# Altium PCB cc_laser_supply_rev-B(1).PcbDoc
Units mm, origin at the board's own origin, x right, y up, seen from the top; angles counter-clockwise.
Board outline 152.4 x 76.2 mm, 4 copper layers (F.Cu, In1.Cu, In2.Cu, B.Cu); 127 components, 120 nets, 405 pads, 0 vias.
Unrouted connection lines stored in the file: 242.
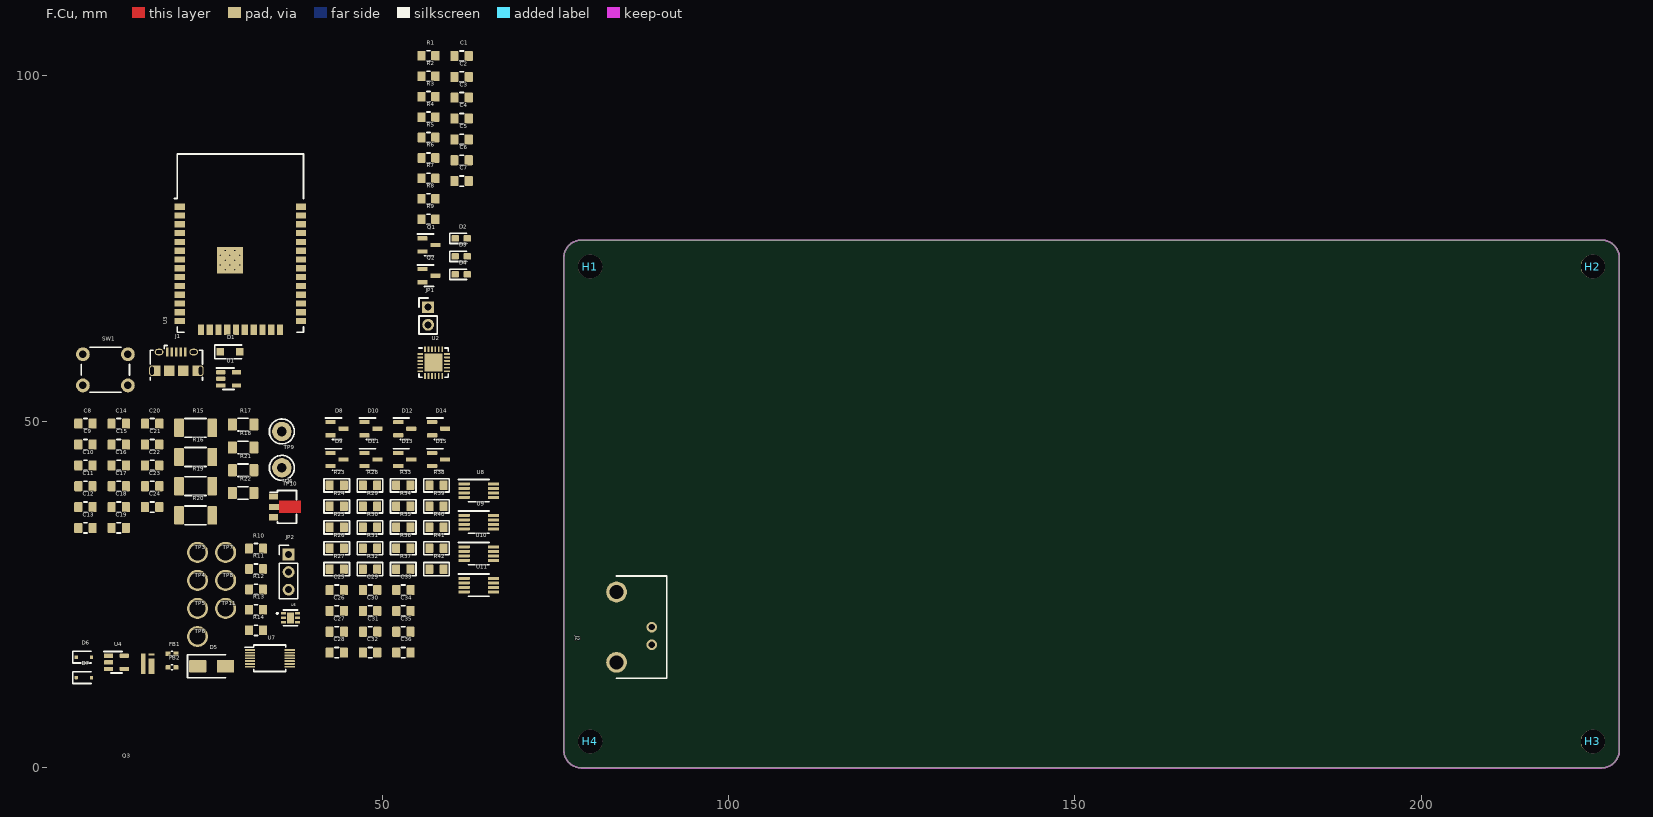
[diagram p0: F.Cu view]
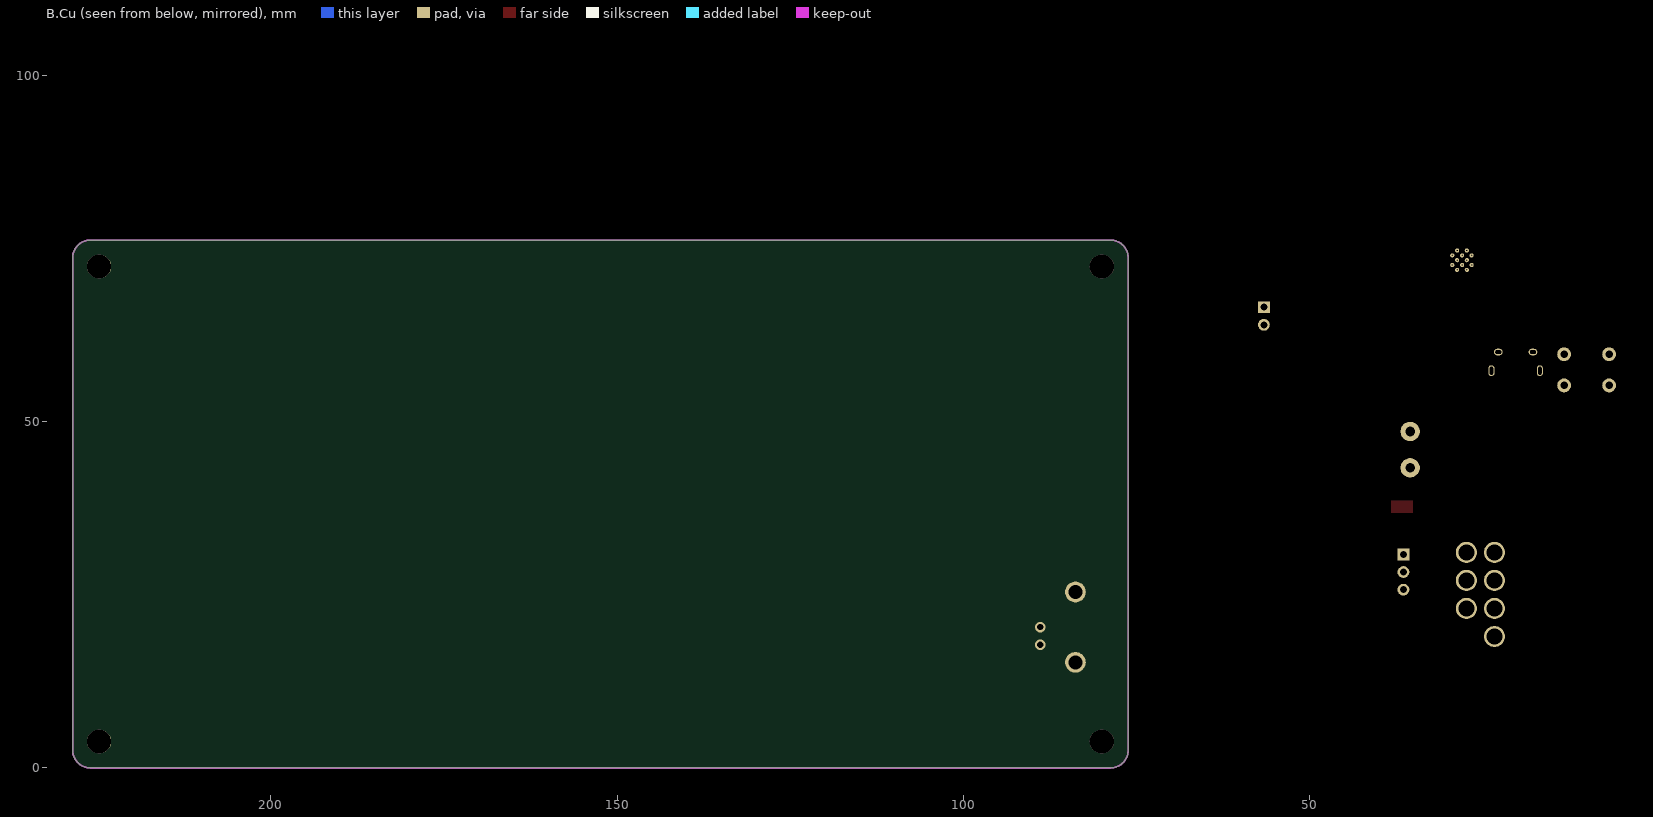
[diagram p1: B.Cu view, seen from below]

## Layer stack, top to bottom
F.Mask: solder mask 0.0102, Solder Resist, Dk 3.5
F.Cu: signal copper 0.0356
Dielectric 1: dielectric 0.32, FR-4, Dk 4.8
In1.Cu: signal copper 0.0356
Dielectric2: dielectric 0.32, FR-4, Dk 4.8
In2.Cu: signal copper 0.0356
Dielectric3: dielectric 0.32, FR-4, Dk 4.8
B.Cu: signal copper 0.0356
B.Mask: solder mask 0.0102, Solder Resist, Dk 3.5

## Board outline
226.06,0 78.74,0 cw(c78.74,2.54) 76.2,2.54 76.2,73.66 cw(c78.74,73.66) 78.74,76.2 226.06,76.2 cw(c226.06,73.66) 228.6,73.66 228.6,2.54 cw(c226.06,2.54) 226.06,0

## Design rules (kind name [scope] priority, off if disabled: settings)
Clearance "Clearence 0.05_PadClass" [InPadClass('Pad Class Clearance 0.05')] p1: gap=0.05 ignorepadtopadclearanceinfootprint=FALSE
MinimumSolderMaskSliver [All] p1: minsoldermaskwidth=0
PolygonConnect [All] p1: connectstyle=Direct reliefconductorwidth=0.254 reliefentries=4 polygonreliefangle="90 Angle" airgapwidth=0.254
RoutingVias [All] p1: holewidth=0.711 width=1.27 viastyle="Through Hole" minholewidth=0.711 minwidth=1.27 maxholewidth=0.711 maxwidth=1.27
SilkToSilkClearance [All] p1: silktosilkclearance=0
SilkToSolderMaskClearance [IsPad] p1: minsilkscreentomaskgap=0 clearancetoexposedcopper=TRUE
SolderMaskExpansion [All] p1: expansion=0.102 istentingtop=FALSE
Width [All] p1: maxlimit=0.254 minlimit=0.254 preferedwidth=0.254
27 further rules are at their usual default settings.

## Classes and differential pairs
pad class "Pad Class Clearance 0.05": Q3-1 Q3-2 Q3-3

## Components (designator, comment, footprint, x,y, rotation, side; value= is the part's Value field where it differs from the comment)
C1 "Comment" C_0805_2012Metric_Pad1.18x1.45mm_HandSolder 61.437,102.785 r0 top
C2 "Comment" C_0805_2012Metric_Pad1.18x1.45mm_HandSolder 61.437,99.775 r0 top
C3 "Comment" C_0805_2012Metric_Pad1.18x1.45mm_HandSolder 61.437,96.765 r0 top
C4 "Comment" C_0805_2012Metric_Pad1.18x1.45mm_HandSolder 61.437,93.755 r0 top
C5 "Comment" C_0805_2012Metric_Pad1.18x1.45mm_HandSolder 61.437,90.745 r0 top
C6 "Comment" C_0805_2012Metric_Pad1.18x1.45mm_HandSolder 61.437,87.735 r0 top
C7 "Comment" C_0805_2012Metric_Pad1.18x1.45mm_HandSolder 61.437,84.725 r0 top
C8 "Comment" C_0805_2012Metric_Pad1.18x1.45mm_HandSolder 7.137,49.695 r0 top
C9 "Comment" C_0805_2012Metric_Pad1.18x1.45mm_HandSolder 7.137,46.685 r0 top
C10 "Comment" C_0805_2012Metric_Pad1.18x1.45mm_HandSolder 7.137,43.675 r0 top
C11 "Comment" C_0805_2012Metric_Pad1.18x1.45mm_HandSolder 7.137,40.665 r0 top
C12 "Comment" C_0805_2012Metric_Pad1.18x1.45mm_HandSolder 7.137,37.655 r0 top
C13 "Comment" C_0805_2012Metric_Pad1.18x1.45mm_HandSolder 7.137,34.645 r0 top
C14 "Comment" C_0805_2012Metric_Pad1.18x1.45mm_HandSolder 11.947,49.695 r0 top
C15 "Comment" C_0805_2012Metric_Pad1.18x1.45mm_HandSolder 11.947,46.685 r0 top
C16 "Comment" C_0805_2012Metric_Pad1.18x1.45mm_HandSolder 11.947,43.675 r0 top
C17 "Comment" C_0805_2012Metric_Pad1.18x1.45mm_HandSolder 11.947,40.665 r0 top
C18 "Comment" C_0805_2012Metric_Pad1.18x1.45mm_HandSolder 11.947,37.655 r0 top
C19 "Comment" C_0805_2012Metric_Pad1.18x1.45mm_HandSolder 11.947,34.645 r0 top
C20 "Comment" C_0805_2012Metric_Pad1.18x1.45mm_HandSolder 16.758,49.695 r0 top
C21 "Comment" C_0805_2012Metric_Pad1.18x1.45mm_HandSolder 16.758,46.685 r0 top
C22 "Comment" C_0805_2012Metric_Pad1.18x1.45mm_HandSolder 16.758,43.675 r0 top
C23 "Comment" C_0805_2012Metric_Pad1.18x1.45mm_HandSolder 16.758,40.665 r0 top
C24 "Comment" C_0805_2012Metric_Pad1.18x1.45mm_HandSolder 16.758,37.655 r0 top
C25 "Comment" C_0805_2012Metric_Pad1.18x1.45mm_HandSolder 43.418,25.675 r0 top
C26 "Comment" C_0805_2012Metric_Pad1.18x1.45mm_HandSolder 43.418,22.665 r0 top
C27 "Comment" C_0805_2012Metric_Pad1.18x1.45mm_HandSolder 43.418,19.655 r0 top
C28 "Comment" C_0805_2012Metric_Pad1.18x1.45mm_HandSolder 43.418,16.645 r0 top
C29 "Comment" C_0805_2012Metric_Pad1.18x1.45mm_HandSolder 48.228,25.675 r0 top
C30 "Comment" C_0805_2012Metric_Pad1.18x1.45mm_HandSolder 48.228,22.665 r0 top
C31 "Comment" C_0805_2012Metric_Pad1.18x1.45mm_HandSolder 48.228,19.655 r0 top
C32 "Comment" C_0805_2012Metric_Pad1.18x1.45mm_HandSolder 48.228,16.645 r0 top
C33 "Comment" C_0805_2012Metric_Pad1.18x1.45mm_HandSolder 53.038,25.675 r0 top
C34 "Comment" C_0805_2012Metric_Pad1.18x1.45mm_HandSolder 53.038,22.665 r0 top
C35 "Comment" C_0805_2012Metric_Pad1.18x1.45mm_HandSolder 53.038,19.655 r0 top
C36 "Comment" C_0805_2012Metric_Pad1.18x1.45mm_HandSolder 53.038,16.645 r0 top
D1 "Comment" D_SOD-123F 28.002,60.075 r0 top
D2 "Comment" LED_0603_1608Metric_Pad1.05x0.95mm_HandSolder 61.393,76.445 r0 top
D3 "Comment" LED_0603_1608Metric_Pad1.05x0.95mm_HandSolder 61.393,73.855 r0 top
D4 "Comment" LED_0603_1608Metric_Pad1.05x0.95mm_HandSolder 61.393,71.265 r0 top
D5 "Comment" D_SMA 25.362,14.675 r0 top
D6 "Comment" D_SOD-323F 6.903,15.995 r0 top
D7 "Comment" D_SOD-323F 6.903,13.045 r0 top
D8 "Comment" SOT-23 43.458,48.975 r0 top
D9 "Comment" SOT-23 43.458,44.525 r0 top
D10 "Comment" SOT-23 48.348,48.975 r0 top
D11 "Comment" SOT-23 48.348,44.525 r0 top
D12 "Comment" SOT-23 53.238,48.975 r0 top
D13 "Comment" SOT-23 53.238,44.525 r0 top
D14 "Comment" SOT-23 58.128,48.975 r0 top
D15 "Comment" SOT-23 58.128,44.525 r0 top
FB1 "Comment" C_0402_1005Metric_Pad0.74x0.62mm_HandSolder 19.627,16.485 r0 top
FB2 "Comment" C_0402_1005Metric_Pad0.74x0.62mm_HandSolder 19.627,14.515 r0 top
H1 "Comment" MountingHole_3.5mm 80.01,72.39 r0 top
H2 "Comment" MountingHole_3.5mm 224.79,72.39 r0 top
H3 "Comment" MountingHole_3.5mm 224.79,3.81 r0 top
H4 "Comment" MountingHole_3.5mm 80.01,3.81 r0 top
J1 "Comment" USB_Micro-B_Amphenol_10118194_Horizontal 20.258,58.645 r0 top
J2 "Comment" BNC_Molex_0731375003 83.82,20.32 r270 top
JP1 "Comment" PinHeader_1x02_P2.54mm_Vertical 56.607,66.515 r0 top
JP2 "Comment" PinHeader_1x03_P2.54mm_Vertical 36.457,30.815 r0 top
Q1 "Comment" SOT-23 56.727,75.515 r0 top
Q2 "Comment" SOT-23 56.727,71.065 r0 top
Q3 "Comment" 3-FCLGA_3.2x2.2mm 16.097,15.045 r0 top
R1 "Comment" R_0805_2012Metric_Pad1.20x1.40mm_HandSolder 56.657,102.815 r0 top
R2 "Comment" R_0805_2012Metric_Pad1.20x1.40mm_HandSolder 56.657,99.865 r0 top
R3 "Comment" R_0805_2012Metric_Pad1.20x1.40mm_HandSolder 56.657,96.915 r0 top
R4 "Comment" R_0805_2012Metric_Pad1.20x1.40mm_HandSolder 56.657,93.965 r0 top
R5 "Comment" R_0805_2012Metric_Pad1.20x1.40mm_HandSolder 56.657,91.015 r0 top
R6 "Comment" R_0805_2012Metric_Pad1.20x1.40mm_HandSolder 56.657,88.065 r0 top
R7 "Comment" R_0805_2012Metric_Pad1.20x1.40mm_HandSolder 56.657,85.115 r0 top
R8 "Comment" R_0805_2012Metric_Pad1.20x1.40mm_HandSolder 56.657,82.165 r0 top
R9 "Comment" R_0805_2012Metric_Pad1.20x1.40mm_HandSolder 56.657,79.215 r0 top
R10 "Comment" R_0805_2012Metric_Pad1.20x1.40mm_HandSolder 31.758,31.665 r0 top
R11 "Comment" R_0805_2012Metric_Pad1.20x1.40mm_HandSolder 31.758,28.715 r0 top
R12 "Comment" R_0805_2012Metric_Pad1.20x1.40mm_HandSolder 31.758,25.765 r0 top
R13 "Comment" R_0805_2012Metric_Pad1.20x1.40mm_HandSolder 31.758,22.815 r0 top
R14 "Comment" R_0805_2012Metric_Pad1.20x1.40mm_HandSolder 31.758,19.865 r0 top
R15 "Comment" R_2010_5025Metric_Pad1.40x2.65mm_HandSolder 23.038,49.095 r0 top
R16 "Comment" R_2010_5025Metric_Pad1.40x2.65mm_HandSolder 23.038,44.885 r0 top
R17 "Comment" R_1206_3216Metric_Pad1.30x1.75mm_HandSolder 29.887,49.555 r0 top
R18 "Comment" R_1206_3216Metric_Pad1.30x1.75mm_HandSolder 29.887,46.265 r0 top
R19 "Comment" R_2010_5025Metric_Pad1.40x2.65mm_HandSolder 23.038,40.675 r0 top
R20 "Comment" R_2010_5025Metric_Pad1.40x2.65mm_HandSolder 23.038,36.465 r0 top
R21 "Comment" R_1206_3216Metric_Pad1.30x1.75mm_HandSolder 29.887,42.975 r0 top
R22 "Comment" R_1206_3216Metric_Pad1.30x1.75mm_HandSolder 29.887,39.685 r0 top
R23 "Comment" R_0805_2012Metric_Pad1.15x1.40mm_HandSolder 43.414,40.788 r0 top
R24 "Comment" R_0805_2012Metric_Pad1.15x1.40mm_HandSolder 43.414,37.763 r0 top
R25 "Comment" R_0805_2012Metric_Pad1.15x1.40mm_HandSolder 43.414,34.737 r0 top
R26 "Comment" R_0805_2012Metric_Pad1.15x1.40mm_HandSolder 43.414,31.712 r0 top
R27 "Comment" R_0805_2012Metric_Pad1.15x1.40mm_HandSolder 43.414,28.687 r0 top
R28 "Comment" R_0805_2012Metric_Pad1.15x1.40mm_HandSolder 48.217,40.788 r0 top
R29 "Comment" R_0805_2012Metric_Pad1.15x1.40mm_HandSolder 48.217,37.763 r0 top
R30 "Comment" R_0805_2012Metric_Pad1.15x1.40mm_HandSolder 48.217,34.737 r0 top
R31 "Comment" R_0805_2012Metric_Pad1.15x1.40mm_HandSolder 48.217,31.712 r0 top
R32 "Comment" R_0805_2012Metric_Pad1.15x1.40mm_HandSolder 48.217,28.687 r0 top
R33 "Comment" R_0805_2012Metric_Pad1.15x1.40mm_HandSolder 53.02,40.788 r0 top
R34 "Comment" R_0805_2012Metric_Pad1.15x1.40mm_HandSolder 53.02,37.763 r0 top
R35 "Comment" R_0805_2012Metric_Pad1.15x1.40mm_HandSolder 53.02,34.737 r0 top
R36 "Comment" R_0805_2012Metric_Pad1.15x1.40mm_HandSolder 53.02,31.712 r0 top
R37 "Comment" R_0805_2012Metric_Pad1.15x1.40mm_HandSolder 53.02,28.687 r0 top
R38 "Comment" R_0805_2012Metric_Pad1.15x1.40mm_HandSolder 57.823,40.788 r0 top
R39 "Comment" R_0805_2012Metric_Pad1.15x1.40mm_HandSolder 57.823,37.763 r0 top
R40 "Comment" R_0805_2012Metric_Pad1.15x1.40mm_HandSolder 57.823,34.737 r0 top
R41 "Comment" R_0805_2012Metric_Pad1.15x1.40mm_HandSolder 57.823,31.712 r0 top
R42 "Comment" R_0805_2012Metric_Pad1.15x1.40mm_HandSolder 57.823,28.687 r0 top
SW1 "Comment" SW_PUSH_6mm 6.757,59.725 r0 top
TP3 "Comment" Keystone-1502-2 23.316,31.116 r0 top
TP4 "Comment" Keystone-1502-2 23.316,27.068 r0 top
TP5 "Comment" Keystone-1502-2 23.316,23.02 r0 top
TP6 "Comment" Keystone-1502-2 23.316,18.972 r0 top
TP7 "Comment" Keystone-1502-2 27.364,31.116 r0 top
TP8 "Comment" Keystone-1502-2 27.364,27.068 r0 top
TP9 "Comment" TestPoint_Loop_D3.50mm_Drill1.4mm_Beaded 35.488,48.575 r0 top
TP10 "Comment" TestPoint_Loop_D3.50mm_Drill1.4mm_Beaded 35.488,43.325 r0 top
TP11 "Comment" Keystone-1502-2 27.364,23.02 r0 top
U1 "Comment" SOT-23-5 27.808,56.175 r0 top
U2 "Comment" QFN-24-1EP_4x4mm_P0.5mm_EP2.6x2.6mm 57.408,58.515 r0 top
U3 "Comment" ESP32-WROOM-32D 29.508,72.775 r0 top
U4 "Comment" SOT-23-5 11.598,15.245 r0 top
U5 "Comment" UCC27611DRVT 36.742,21.665 r0 top
U6 "Comment" SOT-89-3 36.237,37.675 r0 top
U7 "Comment" TSSOP-14_4.4x3.6mm_P0.4mm 33.757,15.815 r0 top
U8 "Comment" MSOP-8_3x3mm_P0.65mm 63.927,40.025 r0 top
U9 "Comment" MSOP-8_3x3mm_P0.65mm 63.927,35.475 r0 top
U10 "Comment" MSOP-8_3x3mm_P0.65mm 63.927,30.925 r0 top
U11 "Comment" MSOP-8_3x3mm_P0.65mm 63.927,26.375 r0 top

## Footprints (in the part's own frame and the unit in brackets; to place one, negate y for a bottom-side part, rotate by r counter-clockwise, add the part's x,y. Pads: shape width x height; smd on the part's side, far side on the other; paste and mask are expansions set on the pad)
3-FCLGA_3.2x2.2mm [mm]
  rect 0.85x0.31 smd mask+0.102: 1(0.545,1.32)
  rect 0.654x2.95 smd mask+0.102: 2(-0.65,0)
  rect 0.85x2.2 smd mask+0.102: 3(0.545,-0.375)
BNC_Molex_0731375003 [mm]
  round 1.524 hole 0.89 paste-2539.97 mask+0.102: 1(0,5.08) 2(2.54,5.08)
  round 3 hole 2.01 paste-2539.97 mask+0.102: Un1(-5.08,0) Un2(5.08,0)
  silkscreen extent -7.38,0 7.38,7.25
C_0402_1005Metric_Pad0.74x0.62mm_HandSolder [mm]
  rrect25% 0.735x0.62 smd mask+0.102: 1(-0.567,0) 2(0.567,0)
  silkscreen extent -0.12,-0.36 0.12,0.36
C_0805_2012Metric_Pad1.18x1.45mm_HandSolder [mm]
  rrect21% 1.175x1.45 smd mask+0.102: 1(-1.038,0) 2(1.038,0)
  silkscreen extent -0.26,-0.73 0.26,0.73
D_SMA [mm]
  rrect14% 2.5x1.8 smd mask+0.102: 1(-2,0) 2(2,0)
  silkscreen extent -3.51,-1.65 2,1.65
D_SOD-123F [mm]
  rrect23% 1.1x1.1 smd mask+0.102: 1(-1.4,0) 2(1.4,0)
  silkscreen extent -2.21,-1 1.65,1
D_SOD-323F [mm]
  rrect25% 0.5x0.5 smd mask+0.102: 1(-1.1,0) 2(1.1,0)
  silkscreen extent -1.61,-0.85 1.05,0.85
ESP32-WROOM-32D [mm]
  rect 1.5x0.9 smd mask+0.102: 1(-8.75,8.25) 2(-8.75,6.98) 3(-8.75,5.71) 4(-8.75,4.44) 5(-8.75,3.17) 6(-8.75,1.9) 7(-8.75,0.63) 8(-8.75,-0.64) 9(-8.75,-1.91) 10(-8.75,-3.18) 11(-8.75,-4.45) 12(-8.75,-5.72) 13(-8.75,-6.99) 14(-8.75,-8.26) 25(8.75,-8.26) 26(8.75,-6.99) 27(8.75,-5.72) 28(8.75,-4.45) 29(8.75,-3.18) 30(8.75,-1.91) 31(8.75,-0.64) 32(8.75,0.63) 33(8.75,1.9) 34(8.75,3.17) 35(8.75,4.44) 36(8.75,5.71) 37(8.75,6.98) 38(8.75,8.25)
  rect 0.9x1.5 smd mask+0.102: 15(-5.71,-9.51) 16(-4.44,-9.51) 17(-3.17,-9.51) 18(-1.9,-9.51) 19(-0.63,-9.51) 20(0.64,-9.51) 21(1.91,-9.51) 22(3.18,-9.51) 23(4.45,-9.51) 24(5.72,-9.51)
  rect 0.9x0.9 smd mask-0.9: 39(-2.9,-0.87) 39(-2.9,0.53) 39(-2.9,1.93) 39(-1.5,-0.87) 39(-1.5,0.53) 39(-1.5,1.93) 39(-0.1,-0.87) 39(-0.1,0.53) 39(-0.1,1.93)
  round 0.6 hole 0.2 paste-2539.97 mask+0.102: 39(-2.9,-0.17) 39(-2.9,1.23) 39(-2.2,-0.87) 39(-2.2,0.53) 39(-2.2,1.93) 39(-1.525,-0.17) 39(-1.525,1.23) 39(-0.8,-0.87) 39(-0.8,0.53) 39(-0.8,1.93) 39(-0.1,-0.17) 39(-0.1,1.23)
  rect 3.8x3.8 smd paste-3.8 mask+0.102: 39(-1.5,0.53)
  silkscreen extent -9.5,-9.88 9.12,15.86
Keystone-1502-2 [mil]
  round 120 hole 90 paste-99999 mask+4: 1(0,0)
LED_0603_1608Metric_Pad1.05x0.95mm_HandSolder [mm]
  rrect25% 1.05x0.95 smd mask+0.102: 1(-0.875,0) 2(0.875,0)
  silkscreen extent -1.66,-0.73 0.8,0.73
MountingHole_3.5mm [mm]
  round 3.5 hole 3.5 paste-2539.97 mask+0.102: Un1(0,0)
MSOP-8_3x3mm_P0.65mm [mm]
  rrect25% 1.625x0.4 smd mask+0.102: 1(-2.113,0.975) 2(-2.113,0.325) 3(-2.113,-0.325) 4(-2.113,-0.975) 5(2.113,-0.975) 6(2.113,-0.325) 7(2.113,0.325) 8(2.113,0.975)
  silkscreen extent -2.93,-1.61 1.5,1.61
PinHeader_1x02_P2.54mm_Vertical [mm]
  rect 1.7x1.7 hole 1 paste-2539.97 mask+0.102: 1(0,0)
  rrect100% 1.7x1.7 hole 1 paste-2539.97 mask+0.102: 2(0,-2.54)
  silkscreen extent -1.33,-3.87 1.33,1.33
PinHeader_1x03_P2.54mm_Vertical [mm]
  rect 1.7x1.7 hole 1 paste-2539.97 mask+0.102: 1(0,0)
  rrect100% 1.7x1.7 hole 1 paste-2539.97 mask+0.102: 2(0,-2.54) 3(0,-5.08)
  silkscreen extent -1.33,-6.41 1.33,1.33
QFN-24-1EP_4x4mm_P0.5mm_EP2.6x2.6mm [mm]
  rrect25% 0.825x0.25 smd mask+0.102: 1(-1.937,1.25) 2(-1.937,0.75) 3(-1.937,0.25) 4(-1.937,-0.25) 5(-1.937,-0.75) 6(-1.937,-1.25) 13(1.937,-1.25) 14(1.937,-0.75) 15(1.937,-0.25) 16(1.937,0.25) 17(1.937,0.75) 18(1.937,1.25)
  rrect25% 0.25x0.825 smd mask+0.102: 7(-1.25,-1.937) 8(-0.75,-1.937) 9(-0.25,-1.937) 10(0.25,-1.937) 11(0.75,-1.937) 12(1.25,-1.937) 19(1.25,1.937) 20(0.75,1.937) 21(0.25,1.937) 22(-0.25,1.937) 23(-0.75,1.937) 24(-1.25,1.937)
  rect 2.6x2.6 smd paste-2.6 mask+0.102: 25(0,0)
  rrect24% 1.05x1.05 on Top Paste mask-1.05: Un1(-0.65,0.65) Un2(-0.65,-0.65) Un3(0.65,0.65) Un4(0.65,-0.65)
  silkscreen extent -2.11,-2.11 2.11,2.11
R_0805_2012Metric_Pad1.15x1.40mm_HandSolder [mm]
  rrect22% 1.15x1.4 smd mask+0.102: 1(-1.025,0) 2(1.025,0)
  silkscreen extent -1.84,-0.95 1.84,0.95
R_0805_2012Metric_Pad1.20x1.40mm_HandSolder [mm]
  rrect21% 1.2x1.4 smd mask+0.102: 1(-1,0) 2(1,0)
  silkscreen extent -0.23,-0.73 0.23,0.73
R_1206_3216Metric_Pad1.30x1.75mm_HandSolder [mm]
  rrect19% 1.3x1.75 smd mask+0.102: 1(-1.55,0) 2(1.55,0)
  silkscreen extent -0.73,-0.91 0.73,0.91
R_2010_5025Metric_Pad1.40x2.65mm_HandSolder [mm]
  rrect18% 1.4x2.65 smd mask+0.102: 1(-2.4,0) 2(2.4,0)
  silkscreen extent -1.53,-1.36 1.53,1.36
SOT-23 [mm]
  rrect25% 1.475x0.6 smd mask+0.102: 1(-0.937,0.95) 2(-0.937,-0.95) 3(0.937,0)
  silkscreen extent -1.68,-1.56 0.65,1.56
SOT-23-5 [mm]
  rrect25% 1.325x0.6 smd mask+0.102: 1(-1.138,0.95) 2(-1.138,0) 3(-1.138,-0.95) 4(1.138,-0.95) 5(1.138,0.95)
  silkscreen extent -1.8,-1.56 0.8,1.56
SOT-89-3 [mm]
  rect 1.3x0.9 smd mask+0.102: 1(-1.95,1.5) 3(-1.95,-1.5)
  rect 1.475x0.9 smd mask+0.102: 2(-1.863,0)
  F.Cu region: 2,-0.867 -1.125,-0.867 -1.125,0.867 2,0.867
  silkscreen extent -2.5,-2.36 1.36,2.36
SW_PUSH_6mm [mm]
  round 2 hole 1.1 paste-2539.97 mask+0.102: 1(0,0) 1(6.5,0) 2(0,-4.5) 2(6.5,-4.5)
  silkscreen extent -0.25,-5.5 6.75,1
TestPoint_Loop_D3.50mm_Drill1.4mm_Beaded [mm]
  round 2.8 hole 1.4 paste-2539.97 mask+0.102: 1(0,0)
  silkscreen extent -1.8,-1.8 1.8,1.8
TSSOP-14_4.4x3.6mm_P0.4mm [mm]
  rrect25% 1.475x0.25 smd mask+0.102: 1(-2.863,1.2) 2(-2.863,0.8) 3(-2.863,0.4) 4(-2.863,0) 5(-2.863,-0.4) 6(-2.863,-0.8) 7(-2.863,-1.2) 8(2.863,-1.2) 9(2.863,-0.8) 10(2.863,-0.4) 11(2.863,0) 12(2.863,0.4) 13(2.863,0.8) 14(2.863,1.2)
  silkscreen extent -3.6,-1.91 2.31,1.91
UCC27611DRVT [mm]
  rect 0.69x0.32 smd mask+0.102: 1(-1.02,0.65) 2(-1.02,0) 3(-1.02,-0.65) 4(1.02,-0.65) 5(1.02,0) 6(1.02,0.65)
  rect 1x1.6 smd paste-1.6 mask+0.102: 7(0,0)
  silkscreen extent -2.01,-1.13 1,1.13
USB_Micro-B_Amphenol_10118194_Horizontal [mm]
  rect 0.4x1.35 smd mask+0.102: 1(-1.3,1.4) 2(-0.65,1.4) 3(0,1.4) 4(0.65,1.4) 5(1.3,1.4)
  rrect100% 0.89x1.55 hole 1.15 slot 0.5 at 0 deg paste-2539.97 mask+0.102: 6(-3.5,-1.3) 6(3.5,-1.3)
  rect 1.2x1.55 smd mask+0.102: 6(-2.9,-1.3) 6(2.9,-1.3)
  rrect100% 1.25x0.95 hole 0.55 slot 0.85 at 0 deg paste-2539.97 mask+0.102: 6(-2.5,1.4) 6(2.5,1.4)
  rect 1.5x1.55 smd mask+0.102: 6(-1,-1.3) 6(1,-1.3)
  rrect100% 0.89x1.55 on Top Paste mask-1.55: Un1(-3.5,-1.3) Un4(3.5,-1.3)
  rrect100% 1.25x0.95 on Top Paste mask-1.25: Un2(-2.5,1.4) Un3(2.5,1.4)
  silkscreen extent -3.76,-2.69 3.76,2.34

## Part data
C1 C2 C3 C4 C5 C6 C7 C8 C9 C10 C11 C12 C13 C14 C15 C16 C17 C18 C19 C20 C21 C22 C23 C24 C25 C26 C27 C28 C29 C30 C31 C32 C33 C34 C35 C36: library part C_0805_2012Metric_Pad1.18x1.45mm_HandSolder, "Capacitor SMD 0805 (2012 Metric), square (rectangular) end terminal, IPC_7351 nominal with elongated pad for handsoldering. (Body size source: IPC-SM-782 page 76, https://www.pcb-3d.com/wordpress/wp-content/uploads/ipc-sm-782a_amendment_1_and_2.pdf, https://docs.google.com/spreadsheets/d/1BsfQQcO9C6DZCsRaXUlFlo91Tg2WpOkGARC1WS5S8t0/edit?usp=sharing), generated with kicad-footprint-generator", ki_description="Unpolarized capacitor, small symbol", ki_keywords="capacitor cap"
  C1 C2 C3 C4 C5 C6 C7: Sheetfile=esp32.kicad_sch, Sheetname=ESP32
  C8 C9 C10 C11 C12 C13 C14 C15 C16 C17 C18 C19 C20 C21 C22 C23 C24: Sheetfile=fet_and_driver.kicad_sch, Sheetname="GaN FET and Current Sensing"
  C25 C26 C27 C28 C29 C30 C31 C32 C33 C34 C35 C36: Sheetfile=peak_detect.kicad_sch, Sheetname="Peak Detection and ADC Filtering"
D1: library part D_SOD-123F, "D_SOD-123F", Sheetfile=esp32.kicad_sch, Sheetname=ESP32, ki_description="Schottky diode", ki_keywords="diode Schottky"
D2 D3 D4: library part LED_0603_1608Metric_Pad1.05x0.95mm_HandSolder, "LED SMD 0603 (1608 Metric), square (rectangular) end terminal, IPC_7351 nominal, (Body size source: http://www.tortai-tech.com/upload/download/2011102023233369053.pdf), generated with kicad-footprint-generator", Sheetfile=esp32.kicad_sch, Sheetname=ESP32
  D2: ki_description="Light emitting diode", ki_keywords="LED diode"
  D3 D4: ki_description="Light emitting diode, small symbol", ki_keywords="LED diode light-emitting-diode"
D5: library part D_SMA, "Diode SMA (DO-214AC)", Sheetfile=fet_and_driver.kicad_sch, Sheetname="GaN FET and Current Sensing", ki_description="Zener diode", ki_keywords=diode
D6 D7: library part D_SOD-323F, "SOD-323F http://www.nxp.com/documents/outline_drawing/SOD323F.pdf", Sheetfile=fet_and_driver.kicad_sch, Sheetname="GaN FET and Current Sensing", ki_description="Schottky diode", ki_keywords="diode Schottky"
D8 D9 D10 D11 D12 D13 D14 D15 Q1 Q2: library part SOT-23, "SOT, 3 Pin (https://www.jedec.org/system/files/docs/to-236h.pdf variant AB), generated with kicad-footprint-generator ipc_gullwing_generator.py"
  D8 D9 D10 D11 D12 D13 D14 D15: Sheetfile=peak_detect.kicad_sch, Sheetname="Peak Detection and ADC Filtering", ki_description="SOT-23 Schottky diode, 4V, 130mA, Alternate KiCAD Library", ki_keywords="diode schottky BAT17"
  Q1 Q2: Sheetfile=esp32.kicad_sch, Sheetname=ESP32
FB1 FB2: library part C_0402_1005Metric_Pad0.74x0.62mm_HandSolder, "Capacitor SMD 0402 (1005 Metric), square (rectangular) end terminal, IPC_7351 nominal with elongated pad for handsoldering. (Body size source: IPC-SM-782 page 76, https://www.pcb-3d.com/wordpress/wp-content/uploads/ipc-sm-782a_amendment_1_and_2.pdf), generated with kicad-footprint-generator", Sheetfile=fet_and_driver.kicad_sch, Sheetname="GaN FET and Current Sensing", ki_description="Ferrite bead, small symbol", ki_keywords="L ferrite bead inductor filter"
H1 H2 H3 H4: library part MountingHole_3.5mm, "Mounting Hole 3.5mm, no annular", Sheetfile=cc_laser_supply_rev-B.kicad_sch, ki_description="Mounting Hole without connection", ki_keywords="mounting hole"
J1: library part USB_Micro-B_Amphenol_10118194_Horizontal, "USB Micro-B receptacle, horizontal, SMD, 10118194, https://cdn.amphenol-icc.com/media/wysiwyg/files/drawing/10118194.pdf", Sheetfile=esp32.kicad_sch, Sheetname=ESP32, ki_description="USB Micro Type B connector", ki_keywords="connector USB micro"
J2: library part BNC_Molex_0731375003, Sheetfile=fet_and_driver.kicad_sch, Sheetname="GaN FET and Current Sensing", ki_description="coaxial connector (BNC, SMA, SMB, SMC, Cinch/RCA, LEMO, ...)", ki_keywords="BNC SMA SMB SMC LEMO coaxial connector CINCH RCA"
JP1: library part PinHeader_1x02_P2.54mm_Vertical, "Through hole straight pin header, 1x02, 2.54mm pitch, single row", Sheetfile=esp32.kicad_sch, Sheetname=ESP32, ki_description="Jumper, 2-pole, open", ki_keywords="Jumper SPST"
JP2: library part PinHeader_1x03_P2.54mm_Vertical, "Through hole straight pin header, 1x03, 2.54mm pitch, single row", Sheetfile=fet_and_driver.kicad_sch, Sheetname="GaN FET and Current Sensing", ki_description="Jumper, 3-pole, pins 1+2 closed/bridged", ki_keywords="Jumper SPDT"
Q3: library part 3-FCLGA_3.2x2.2mm, Sheetfile=fet_and_driver.kicad_sch, Sheetname="GaN FET and Current Sensing", ki_description="0.2A Id, 200V Vds, N-Channel MOSFET, 2.6V Logic Level, TO-92", ki_keywords="N-Channel MOSFET Logic-Level"
R1 R2 R3 R4 R5 R6 R7 R8 R9 R10 R11 R12 R13 R14: library part R_0805_2012Metric_Pad1.20x1.40mm_HandSolder, "Resistor SMD 0805 (2012 Metric), square (rectangular) end terminal, IPC_7351 nominal with elongated pad for handsoldering. (Body size source: IPC-SM-782 page 72, https://www.pcb-3d.com/wordpress/wp-content/uploads/ipc-sm-782a_amendment_1_and_2.pdf), generated with kicad-footprint-generator", ki_description="Resistor, small US symbol", ki_keywords="r resistor"
  R1 R2 R3 R4 R5 R6 R7 R8 R9: Sheetfile=esp32.kicad_sch, Sheetname=ESP32
  R10 R11 R12 R13 R14: Sheetfile=fet_and_driver.kicad_sch, Sheetname="GaN FET and Current Sensing"
R15 R16 R19 R20: library part R_2010_5025Metric_Pad1.40x2.65mm_HandSolder, "Resistor SMD 2010 (5025 Metric), square (rectangular) end terminal, IPC_7351 nominal with elongated pad for handsoldering. (Body size source: IPC-SM-782 page 72, https://www.pcb-3d.com/wordpress/wp-content/uploads/ipc-sm-782a_amendment_1_and_2.pdf), generated with kicad-footprint-generator", Sheetfile=fet_and_driver.kicad_sch, Sheetname="GaN FET and Current Sensing", ki_description="Resistor, small US symbol", ki_keywords="r resistor"
R17 R18 R21 R22: library part R_1206_3216Metric_Pad1.30x1.75mm_HandSolder, "Resistor SMD 1206 (3216 Metric), square (rectangular) end terminal, IPC_7351 nominal with elongated pad for handsoldering. (Body size source: IPC-SM-782 page 72, https://www.pcb-3d.com/wordpress/wp-content/uploads/ipc-sm-782a_amendment_1_and_2.pdf), generated with kicad-footprint-generator", Sheetfile=fet_and_driver.kicad_sch, Sheetname="GaN FET and Current Sensing", ki_description="Resistor, small US symbol", ki_keywords="r resistor"
R23 R24 R25 R26 R27 R28 R29 R30 R31 R32 R33 R34 R35 R36 R37 R38 R39 R40 R41 R42: library part R_0805_2012Metric_Pad1.15x1.40mm_HandSolder, "Resistor SMD 0805 (2012 Metric), square (rectangular) end terminal, IPC_7351 nominal with elongated pad for handsoldering. (Body size source: https://docs.google.com/spreadsheets/d/1BsfQQcO9C6DZCsRaXUlFlo91Tg2WpOkGARC1WS5S8t0/edit?usp=sharing), Alternate KiCad Library", Sheetfile=peak_detect.kicad_sch, Sheetname="Peak Detection and ADC Filtering", ki_description="Resistor, small US symbol", ki_keywords="r resistor"
SW1: library part SW_PUSH_6mm, "https://www.omron.com/ecb/products/pdf/en-b3f.pdf", Sheetfile=esp32.kicad_sch, Sheetname=ESP32, ki_description="Push button switch, generic, two pins", ki_keywords="switch normally-open pushbutton push-button"
TP3 TP4 TP5 TP6 TP7 TP8 TP11: library part Keystone-1502-2, Sheetfile=fet_and_driver.kicad_sch, Sheetname="GaN FET and Current Sensing", ki_description="test point", ki_keywords="test point tp"
TP9 TP10: library part TestPoint_Loop_D3.50mm_Drill1.4mm_Beaded, "wire loop with bead as test point, loop diameter 3.5mm, hole diameter 1.4mm", Sheetfile=fet_and_driver.kicad_sch, Sheetname="GaN FET and Current Sensing", ki_description="test point", ki_keywords="test point tp"
U1 U4: library part SOT-23-5, "SOT, 5 Pin (https://www.jedec.org/sites/default/files/docs/Mo-178c.PDF variant AA), generated with kicad-footprint-generator ipc_gullwing_generator.py", ki_description="600mA low dropout linear regulator, with enable pin, 3.8V-6V input voltage range, 3.3V fixed positive output, SOT-23-5", ki_keywords="linear regulator ldo fixed positive"
  U1: Sheetfile=esp32.kicad_sch, Sheetname=ESP32
  U4: Sheetfile=fet_and_driver.kicad_sch, Sheetname="GaN FET and Current Sensing"
U2: library part QFN-24-1EP_4x4mm_P0.5mm_EP2.6x2.6mm, "QFN, 24 Pin (http://ww1.microchip.com/downloads/en/PackagingSpec/00000049BQ.pdf#page=278), generated with kicad-footprint-generator ipc_noLead_generator.py", Sheetfile=esp32.kicad_sch, Sheetname=ESP32, ki_description="Single-Chip USB-to-UART Bridge, USB 2.0 Full-Speed, 2Mbps UART, QFN-24", ki_keywords="uart usb bridge interface transceiver"
U3: library part ESP32-WROOM-32D, "2.4 GHz Wi-Fi and Bluetooth module, https://www.espressif.com/sites/default/files/documentation/esp32-wroom-32d_esp32-wroom-32u_datasheet_en.pdf", Sheetfile=esp32.kicad_sch, Sheetname=ESP32, ki_description="RF Module, ESP32-D0WD SoC, Wi-Fi 802.11b/g/n, Bluetooth, BLE, 32-bit, 2.7-3.6V, onboard antenna, SMD", ki_keywords="RF Radio BT ESP ESP32 Espressif onboard PCB antenna"
U5: library part UCC27611DRVT, PACKAGE="WSON-6 Texas Instruments", AVAILABILITY=Warning, DESCRIPTION="4-A/6-A single-channel gate driver with 4-V UVLO and 5-V regulated output 6-WSON -40 to 140", DIGIKEY-PURCHASE-URL=https://snapeda.com/shop?store=DigiKey&id=525421, MF="Texas Instruments", MOUSER-PURCHASE-URL=https://snapeda.com/shop?store=Mouser&id=525421, MP=UCC27611DRVT, PRICE=None, Sheetfile=fet_and_driver.kicad_sch, Sheetname="GaN FET and Current Sensing", TEXAS_INSTRUMENTS-PURCHASE-URL=https://snapeda.com/shop?store=Texas+Instruments&id=525421
U6: library part SOT-89-3, "SOT-89-3, http://ww1.microchip.com/downloads/en/DeviceDoc/3L_SOT-89_MB_C04-029C.pdf", Sheetfile=fet_and_driver.kicad_sch, Sheetname="GaN FET and Current Sensing", ki_description="Low Quiescent Current LDO Regulator, 5.0V, 250mA, Vin<=16V, SOT-89", ki_keywords="REGULATOR LDO"
U7: library part TSSOP-14_4.4x3.6mm_P0.4mm, "TSSOP, 14 Pin (JEDEC MO-194 Var AA https://www.jedec.org/document_search?search_api_views_fulltext=MO-194), generated with kicad-footprint-generator ipc_gullwing_generator.py", Sheetfile=fet_and_driver.kicad_sch, Sheetname="GaN FET and Current Sensing"
U8 U9 U10 U11: library part MSOP-8_3x3mm_P0.65mm, "MSOP, 8 Pin (https://www.jedec.org/system/files/docs/mo-187F.pdf variant AA), generated with kicad-footprint-generator ipc_gullwing_generator.py", Sheetfile=peak_detect.kicad_sch, Sheetname="Peak Detection and ADC Filtering", ki_description="SO-8 Dual CMOS Fast Precision Rail-to-Rail Operational Amplifier, 100μV Offset, 2.5μV/°C Drift, 50MHz GBW, Alternate KiCAD Library", ki_keywords="dual opamp operational amplifier cmos rail-to-rail fast precision LTC6244"

## Nets (pads, with @x,y where several pads share a name; then routed paths per layer and width w, separated by ;. In a path a pad name is that pad's centre, name@x,y a point inside that pad or via, vN(x,y) a via of type N, cw(c..) or ccw(c..) an arc to the next point about the centre after c; other vN are vias at no path point)
+3.3VA: C11.1 C12.1 FB2.1 JP1.1 TP4.1 U4.5
+3V3: C2.1 C3.1 C4.1 C6.1 D2.2 D3.2 D4.2 JP1.2 R7.2 R8.2 R9.2 U1.5 U2.5 U2.6 U2.7 U3.2
+5V: C8.1 C25.1 C26.1 C27.1 C28.1 FB1.1 R10.1 R14.1 TP11.1 U4.1 U8.8 U9.8 U10.8 U11.8
ADC_1A: C33.1 R39.2 U3.4
ADC_5A: C34.1 R40.2 U3.5
ADC_10A: C35.1 R41.2 U3.8
ADC_20A: C36.1 R42.2 U3.9
DTR: R6.1 U2.23
GND: C1.2 C2.2 C3.2 C4.2 C5.2 C6.2 C7.2 C8.2 C9.2 C10.2 C11.2 C12.2 C13.2 C14.2 C15.2 C16.2 C17.2 C18.2 C19.2 C20.2 C21.2 C22.2 C23.1 C24.1 C25.2 C26.2 C27.2 C28.2 C33.2 C34.2 C35.2 C36.2 D5.2 J1.5 J2.2 Q3.2 R2.1 R13.2 R31.2 R32.2 R33.2 R34.2 R35.2 R36.2 R37.2 R38.2 SW1.1 TP6.1 TP8.1 U1.2 U2.2 U2.25 U3.1 U3.15 U3.38 U3.39 U4.2 U5.2 U5.7 U6.1 U7.11 U8.4 U9.4 U10.4 U11.4
GPIO0: U3.25
Net-(C29-Pad2): C29.2 R31.1
Net-(C30-Pad2): C30.2 R32.1
Net-(C31-Pad2): C31.2 R33.1
Net-(C32-Pad2): C32.2 R34.1
Net-(D1-A): D1.2 J1.1
Net-(D2-K): D2.1 R2.2
Net-(D3-K): D3.1 R3.2
Net-(D4-K): D4.1 R4.2
Net-(D5-K): D5.1 D6.2 D7.2 Q3.3 TP10.1
Net-(D8-A): D8.1 R27.1 U8.2
Net-(D9-A): D9.1 R28.1 U9.2
Net-(D10-A): D10.1 R29.1 U10.2
Net-(D10-K): D10.3 D14.1 U10.1
Net-(D11-A): D11.1 R30.1 U11.2
Net-(D11-K): D11.3 D15.1 U11.1
Net-(D12-A): D8.3 D12.1 U8.1
Net-(D12-K): C29.1 D12.3 R35.1 U8.5
Net-(D13-A): D9.3 D13.1 U9.1
Net-(D13-K): C30.1 D13.3 R36.1 U9.5
Net-(D14-K): C31.1 D14.3 R37.1 U10.5
Net-(D15-K): C32.1 D15.3 R38.1 U11.5
Net-(J1-D+): J1.3 U2.3
Net-(J1-D-): J1.2 U2.4
Net-(J2-In): J2.1 JP2.3 TP3.1
Net-(JP2-C): JP2.2 U5.3
Net-(Q1-PadB): R5.2
Net-(Q2-PadB): R6.2
Net-(Q3-G): Q3.1 R11.2 R12.2 R13.1
Net-(U1-EN): R1.2 U1.3
Net-(U2-RXT{slash}GPIO.1): R4.1 U2.13
Net-(U2-TXT{slash}GPIO.0): R3.1 U2.14
Net-(U2-VPP): C5.1 U2.16
Net-(U4-EN): R10.2 U4.3
Net-(U5-VDD): C9.1 C10.1 FB1.2 U5.1
Net-(U5-VREF): C13.1 U5.6
Net-(U6-VO): C16.1 C17.1 R14.2 U6.3
Net-(U7A--): R15.2 R16.1 R19.2 R20.1 U7.2 U7.5
Net-(U7A-VCC): C23.2 C24.2 FB2.2 U7.4
Net-(U7B--): R16.2 R17.1 R20.2 R21.1 U7.6 U7.10
Net-(U7C--): R17.2 R18.1 R21.2 R22.1 U7.9 U7.12
Net-(U8A-+): R23.2 U8.3
Net-(U8B--): R27.2 R39.1 U8.6 U8.7
Net-(U9A-+): R24.2 U9.3
Net-(U9B--): R28.2 R40.1 U9.6 U9.7
Net-(U10A-+): R25.2 U10.3
Net-(U10B--): R29.2 R41.1 U10.6 U10.7
Net-(U11A-+): R26.2 U11.3
Net-(U11B--): R30.2 R42.1 U11.6 U11.7
OUTH: R11.1 U5.5
OUTL: R12.1 U5.4
PULSE_IN: JP2.1 U3.33
RESET: C7.1 R7.1 SW1.2 U3.3
RTS: R5.1 U2.19
RXD0: U2.21 U3.34
SCL: R8.1 U3.36
SDA: R9.1 U3.37
SENSE_1A: R23.1 U7.1
SENSE_5A: R24.1 U7.7
SENSE_10A: R25.1 U7.8
SENSE_20A: R26.1 U7.14
SENSE_IN: C18.1 C19.1 C20.1 C21.1 C22.1 D6.1 D7.1 R15.1 R19.1 TP7.1 U7.3
SENSE_OUT: R18.2 R22.2 TP9.1 U7.13
TXD0: U2.20 U3.35
unconnected-(D8-NC-Pad2): D8.2
unconnected-(D9-NC-Pad2): D9.2
unconnected-(D10-NC-Pad2): D10.2
unconnected-(D11-NC-Pad2): D11.2
unconnected-(D12-NC-Pad2): D12.2
unconnected-(D13-NC-Pad2): D13.2
unconnected-(D14-NC-Pad2): D14.2
unconnected-(D15-NC-Pad2): D15.2
unconnected-(J1-ID-Pad4): J1.4
unconnected-(J1-Shield-Pad6): J1.6
unconnected-(U1-NC-Pad4): U1.4
unconnected-(U2-GPIO.3-Pad11): U2.11
unconnected-(U2-NC-Pad10): U2.10
unconnected-(U2-RS485{slash}GPIO.2-Pad12): U2.12
unconnected-(U2-SUSPEND-Pad17): U2.17
unconnected-(U2-{\C\T\S\}\-\P\a\d\1\8\)\: U2.18
unconnected-(U2-{\D\C\D\}\-\P\a\d\2\4\)\: U2.24
unconnected-(U2-{\D\S\R\}\-\P\a\d\2\2\)\: U2.22
unconnected-(U2-{\R\I\}\-\P\a\d\1\)\: U2.1
unconnected-(U2-{\R\S\T\}\-\P\a\d\9\)\: U2.9
unconnected-(U2-{\S\U\S\P\E\N\D\}\-\P\a\d\1\5\)\: U2.15
unconnected-(U3-IO2-Pad24): U3.24
unconnected-(U3-IO4-Pad26): U3.26
unconnected-(U3-IO5-Pad29): U3.29
unconnected-(U3-IO12-Pad14): U3.14
unconnected-(U3-IO13-Pad16): U3.16
unconnected-(U3-IO14-Pad13): U3.13
unconnected-(U3-IO15-Pad23): U3.23
unconnected-(U3-IO16-Pad27): U3.27
unconnected-(U3-IO17-Pad28): U3.28
unconnected-(U3-IO18-Pad30): U3.30
unconnected-(U3-IO19-Pad31): U3.31
unconnected-(U3-IO25-Pad10): U3.10
unconnected-(U3-IO26-Pad11): U3.11
unconnected-(U3-IO27-Pad12): U3.12
unconnected-(U3-IO34-Pad6): U3.6
unconnected-(U3-IO35-Pad7): U3.7
unconnected-(U3-NC-Pad32): U3.32
unconnected-(U3-SCK{slash}CLK-Pad20): U3.20
unconnected-(U3-SCS{slash}CMD-Pad19): U3.19
unconnected-(U3-SDI{slash}SD1-Pad22): U3.22
unconnected-(U3-SDO{slash}SD0-Pad21): U3.21
unconnected-(U3-SHD{slash}SD2-Pad17): U3.17
unconnected-(U3-SWP{slash}SD3-Pad18): U3.18
unconnected-(U4-NC-Pad4): U4.4
VBUS: C1.1 D1.1 R1.1 U1.1 U2.8
VIN: C14.1 C15.1 TP5.1 U6.2
pads on no net: H1.Un1 H2.Un1 H3.Un1 H4.Un1 J1.Un1 J1.Un2 J1.Un3 J1.Un4 J2.Un1 J2.Un2 Q1.1 Q1.2 Q1.3 Q2.1 Q2.2 Q2.3 U2.Un1 U2.Un2 U2.Un3 U2.Un4

## Keep-outs
Edge.Cuts:
  lines w0: 76.2,2.54 ccw(c78.74,2.54) 78.74,0 226.06,0 ccw(c226.06,2.54) 228.6,2.54 228.6,73.66 ccw(c226.06,73.66) 226.06,76.2 78.74,76.2 ccw(c78.74,73.66) 76.2,73.66 76.2,2.54
  lines w0.254: 76.2,2.54 ccw(c78.74,2.54) 78.74,0 226.06,0 ccw(c226.06,2.54) 228.6,2.54 228.6,73.66 ccw(c226.06,73.66) 226.06,76.2 78.74,76.2 ccw(c78.74,73.66) 76.2,73.66 76.2,2.54